# EAGLE board SAMD21_Pro_RF_1W_reroute (EAGLE 9.0.1)
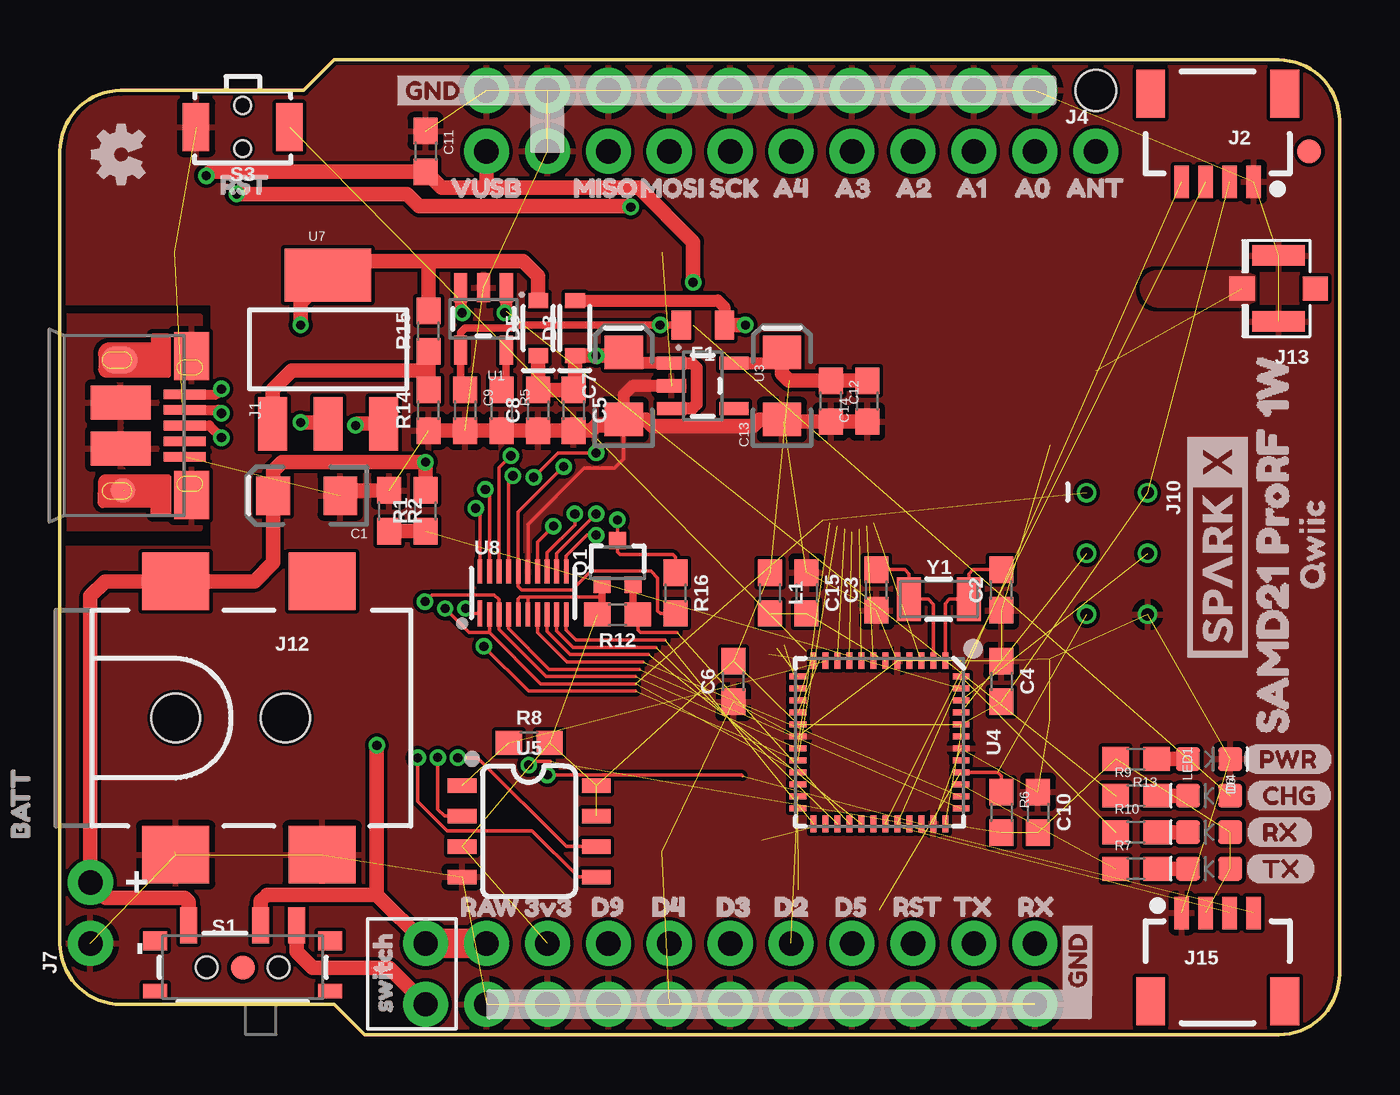
[diagram p0: board, top side]
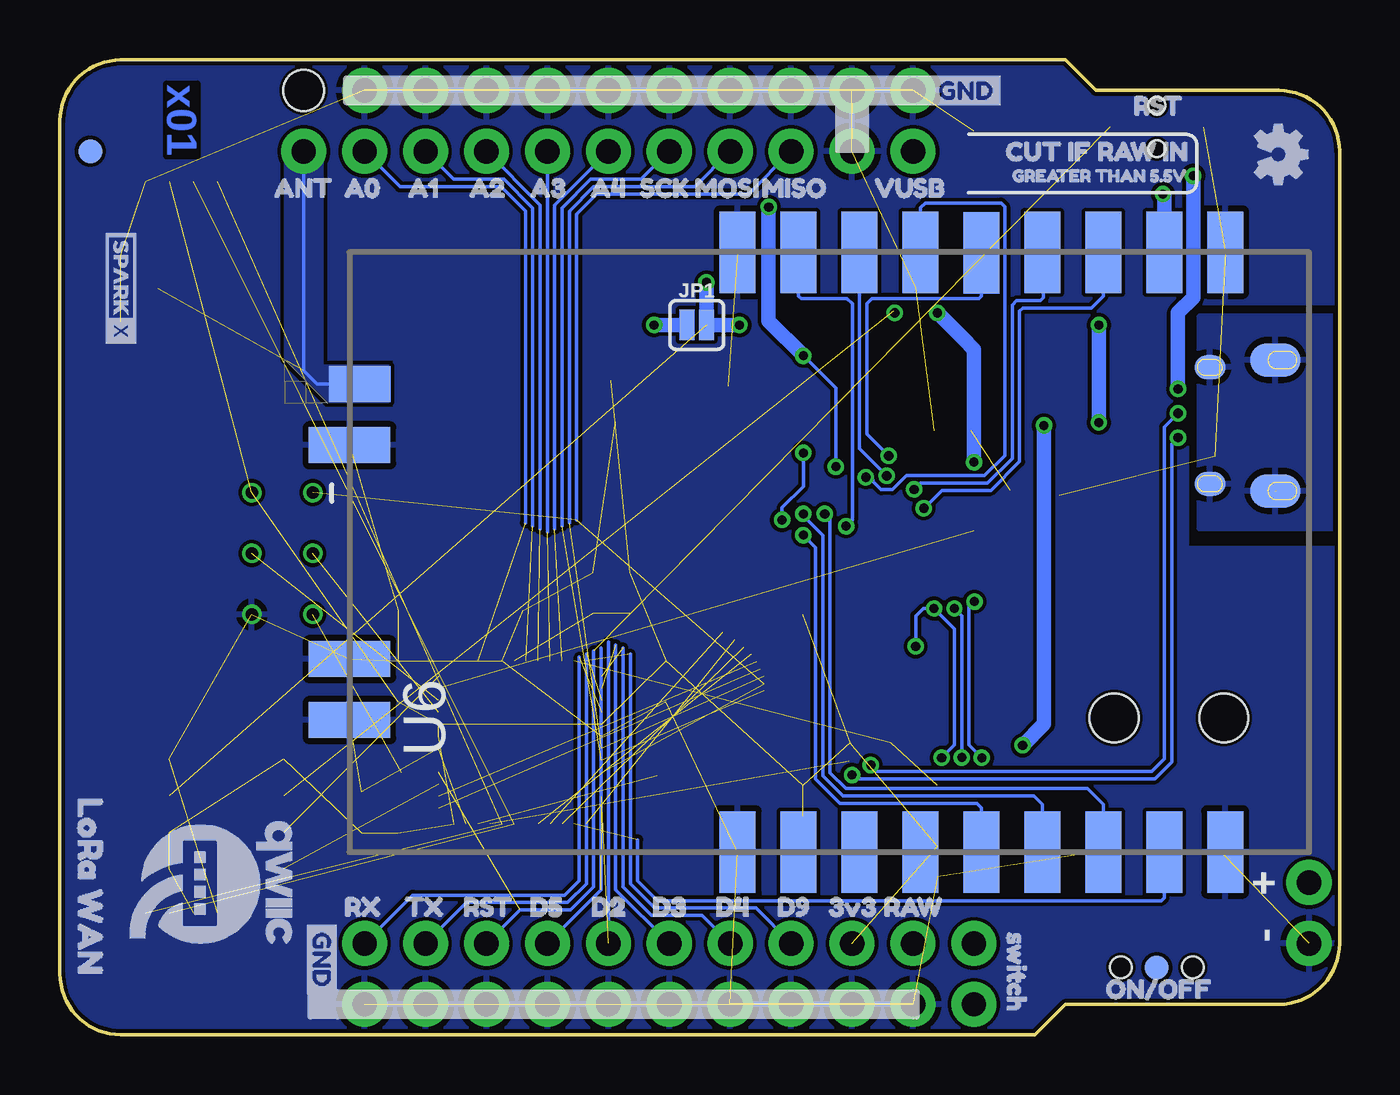
[diagram p1: board, bottom side, seen from below]

Size 53.34 x 40.64 mm. Coordinates in mm from the lower left corner, seen from the top.
Outline: 11.43,1.27 12.7,0 50.8,0 arc90 53.34,2.54 53.34,38.1 arc90 50.8,40.64 11.43,40.64 10.16,39.37 2.54,39.37 arc90 0,36.83 0,3.81 arc90 2.54,1.27 11.43,1.27
Copper layers (1*16): Top 0.035mm / dielectric 1.5mm / Bottom 0.035mm
Design rules "SparkFun-2-layer-PCBWay-LIMIT": minimum track width 6mil, minimum drill 0.3mm, track to track 6mil, track to pad 6mil, pad to pad 6mil, via to via 6mil, smd to smd 6mil, copper to edge 6mil, drill to drill 6mil, minimum pad ring 6mil, minimum via ring 6mil, stop-mask expansion 4mil, vias tented up to drill 25mil, thermal gap 10mil
Net classes: 0 default: width 0 mm, drill 0 mm; 1 vcc: width 0 mm
Holes 1.7 mm at 43.18,39.37

## Footprints (pad centres in the part's own frame; a part is rotated, then mirrored left to right if it is on the bottom)
EIA3216 = smd 1.4 x 1.6: + 1.4,0; - -1.4,0
0603 = smd 1.1 x 1: 1 -0.85,0; 2 0.85,0
LED-0603 = smd 1 x 1: A -0.877,0; C 0.877,0
SOD-323 = smd 0.63 x 0.83: A 1.15,0; C -1.15,0
0805 = smd 0.8 x 1.2: 1 -0.9,0; 2 0.9,0
FIDUCIAL-1X2 = smd 1 x 1: 1 0,0
USB-MICROB-PTH-MILL = smd 0.4 x 1.75: D+ 0,0; D- -0.65,0; GND 1.3,0; ID 0.65,0; VBUS -1.3,0 | smd 2 x 1.46: SHIELD -2.9,0.275; SHIELD2 2.9,0.275 | smd 1.425 x 2.5: SHIELD3 -0.963,-2.675; SHIELD4 0.963,-2.675 | smd 1.4 x 2.1 bottom: SHIELD5 -2.731,-2.531; SHIELD7 2.729,-2.531 | smd 1 x 1: SHIELD6 2.7,-2.575 | smd 1.1 x 1.5: SHIELD8 -2.731,-2.731 | smd 1 x 1.3 bottom: SHIELD9 -2.43,0.195; SHIELD10 2.43,0.195
1X04_1MM_RA = smd 0.6 x 1.35: 1 -1.5,0; 2 -0.5,0; 3 0.5,0; 4 1.5,0 | smd 1.2 x 2: NC1 2.8,-3.675; NC2 -2.8,-3.675
1X10_NO_SILK = drill 1.016 pad 1.88: 1 0,0; 2 2.54,0; 3 5.08,0; 4 7.62,0; 5 10.16,0; 6 12.7,0; 7 15.24,0; 8 17.78,0; 9 20.32,0; 10 22.86,0
1X01_NO_SILK = drill 1.016 pad 1.88: 1 0,0
1X09_NO_SILK = drill 1.016 pad 1.88: 1 0,0; 2 2.54,0; 3 5.08,0; 4 7.62,0; 5 10.16,0; 6 12.7,0; 7 15.24,0; 8 17.78,0; 9 20.32,0
1X02_NO_SILK = drill 1.016 pad 1.88: 1 0,0; 2 2.54,0
2X3_TEST_POINTS = drill 0.508: 1 -2.54,-1.27; 2 -2.54,1.27; 3 0,-1.27; 4 0,1.27; 5 2.54,-1.27; 6 2.54,1.27
POWER_JACK_SMD = smd 2.8 x 2.4: GND 0,-5.7; P$4 6.1,-5.7; VIN0 0,5.7; VIN1 6.1,5.7 | hole 2.032: 0,0; 4.572,0
U.FL = smd 2.2 x 0.85: 1 0,1.375; 2 0,-1.375 | smd 1.05 x 1: FEED 1.525,0; NC -1.525,0
SMT-JUMPER_2_NO_SILK = smd 0.635 x 1.27: 1 -0.406,0; 2 0.406,0
SOT323 = smd 0.7 x 0.7: 1 -0.65,-0.925; 2 0.65,-0.925; 3 0,0.925
SWITCH_SPST_SMD_A = smd 0.7 x 1.5: 1 -2.25,-1.75; 2 -0.75,-1.75; 3 2.25,-1.75 | smd 1 x 0.6: GND1 -3.65,1; GND3 3.65,1 | smd 1 x 0.8: GND2 -3.65,-1.1; GND4 3.65,-1.1 | hole 0.9: -1.5,0; 1.5,0
TACTILE_SWITCH_SMD_RIGHT_ANGLE = smd 1.1 x 2: 1 -1.95,0; 2 1.95,0 | hole 0.7: 0,0.9; 0,-0.9
SOT23-5 = smd 0.55 x 1.2: 1 -0.95,-1.3; 2 0,-1.3; 3 0.95,-1.3; 4 0.95,1.3; 5 -0.95,1.3
QFN-48_NO_EXPOSED_PAD = smd 0.7 x 0.25: 1 -3.4,2.75; 2 -3.4,2.25; 3 -3.4,1.75; 4 -3.4,1.25; 5 -3.4,0.75; 6 -3.4,0.25; 7 -3.4,-0.25; 8 -3.4,-0.75; 9 -3.4,-1.25; 10 -3.4,-1.75; 11 -3.4,-2.25; 12 -3.4,-2.75; 25 3.4,-2.75; 26 3.4,-2.25; 27 3.4,-1.75; 28 3.4,-1.25; 29 3.4,-0.75; 30 3.4,-0.25; 31 3.4,0.25; 32 3.4,0.75; 33 3.4,1.25; 34 3.4,1.75; 35 3.4,2.25; 36 3.4,2.75 | smd 0.25 x 0.7: 13 -2.75,-3.4; 14 -2.25,-3.4; 15 -1.75,-3.4; 16 -1.25,-3.4; 17 -0.75,-3.4; 18 -0.25,-3.4; 19 0.25,-3.4; 20 0.75,-3.4; 21 1.25,-3.4; 22 1.75,-3.4; 23 2.25,-3.4; 24 2.75,-3.4; 37 2.75,3.4; 38 2.25,3.4; 39 1.75,3.4; 40 1.25,3.4; 41 0.75,3.4; 42 0.25,3.4; 43 -0.25,3.4; 44 -0.75,3.4; 45 -1.25,3.4; 46 -1.75,3.4; 47 -2.25,3.4; 48 -2.75,3.4
SO08 = smd 0.6 x 1.2: 1 -1.905,-2.8; 2 -0.635,-2.8; 3 0.635,-2.8; 4 1.905,-2.8; 5 1.905,2.8; 6 0.635,2.8; 7 -0.635,2.8; 8 -1.905,2.8
E19-915MS1W = smd 3.4 x 1.5: P$1 0,23.82; P$2 0,21.28; P$3 0,18.74; P$4 0,16.2; P$5 0,13.66; P$6 0,11.12; P$7 0,8.58; P$8 0,6.04; P$9 0,3.5; P$10 25,3.5; P$11 25,6.04; P$12 25,8.58; P$13 25,11.12; P$14 24.98,13.66; P$15 25,16.2; P$16 25,18.74; P$17 25,21.28; P$18 25,23.82 | smd 1.5 x 2.55: P$19 19.5,39.568 | smd 1.5 x 3.4: P$20 16.96,40; P$21 8.04,40; P$22 5.5,40
SOT223 = smd 1.219 x 2.235: 1 -2.311,-3.099; 2 0,-3.099; 3 2.311,-3.099 | smd 3.6 x 2.2: 4 0,3.099
UFDFN-20 = smd 0.2 x 1.1: 1 -1.8,-0.85 | smd 0.2 x 1: 2 -1.4,-0.9; 3 -1,-0.9; 4 -0.6,-0.9; 5 -0.2,-0.9; 6 0.2,-0.9; 7 0.6,-0.9; 8 1,-0.9; 9 1.4,-0.9; 10 1.8,-0.9; 11 1.8,0.9; 12 1.4,0.9; 13 1,0.9; 14 0.6,0.9; 15 0.2,0.9; 16 -0.2,0.9; 17 -0.6,0.9; 18 -1,0.9; 19 -1.4,0.9; 20 -1.8,0.9
CRYSTAL-SMD-3.2X1.5MM = smd 1 x 1.8: P$1 -1.25,0; P$2 1.25,0

## Placement (x,y rotation side)
C1  10uF  [EIA3216]  10.29,22.48 180 top
C2  15pF  [0603]  39.24,18.54 90 top
C3  15pF  [0603]  34.04,18.54 90 top
C4  0.1uF  [0603]  39.24,14.73 270 top
C5  1.0uF  [0603]  21.41,26.04 270 top
C6  0.1uF  [0603]  28.07,14.73 90 top
C7  10uF  [EIA3216]  23.5,27.05 90 top
C8  0.1uF  [0603]  19.94,26.04 90 top
C9  4.7uF  [0603]  16.89,26.04 270 top
C10  0.1uF  [0603]  40.77,9.27 270 top
C11  0.1uF  [0603]  15.24,36.83 270 top
C12  1.0uF  [0603]  32.13,26.42 270 top
C13  10uF  [EIA3216]  30.1,27.05 90 top
C14  0.1uF  [0603]  33.66,26.42 90 top
C15  0.1uF  [0603]  31.11,18.41 270 top
D1  Green  [LED-0603]  47.9,6.92 180 top
D3  3A/10V/300mV  [SOD-323]  21.46,29.46 90 top
D4  BLUE  [LED-0603]  47.9,9.97 180 top
D5  3A/10V/300mV  [SOD-323]  19.94,29.46 90 top
D6  Yellow  [LED-0603]  47.9,8.45 180 top
F1  6V 0.5A  [0805]  26.8,29.59 180 top
FD1  FIDUCIAL1X2  [FIDUCIAL-1X2]  7.62,2.79 0 bottom
FD2  FIDUCIAL1X2  [FIDUCIAL-1X2]  52.07,36.83 0 bottom
FD3  FIDUCIAL1X2  [FIDUCIAL-1X2]  7.62,2.79 0 top
FD4  FIDUCIAL1X2  [FIDUCIAL-1X2]  52.07,36.83 0 top
FRAME2  FRAME-LEDGER  [CREATIVE_COMMONS]  -13.97,-12.7 0 top  (outside the outline)
J1  [USB-MICROB-PTH-MILL]  5.21,25.4 270 top
J2  [1X04_1MM_RA]  48.26,35.56 180 top
J3  [1X10_NO_SILK]  17.78,3.81 0 top
J4  [1X01_NO_SILK]  43.18,36.83 0 top
J5  [1X09_NO_SILK]  20.32,39.37 0 top
J6  [1X10_NO_SILK]  17.78,1.27 0 top
J7  PTH  [1X02_NO_SILK]  1.27,3.81 90 top
J8  [1X02_NO_SILK]  17.78,39.37 270 top
J9  External On/Off  [1X02_NO_SILK]  15.24,3.81 270 top
J10  AVR_SPI_PROG_3X2TESTPOINTS  [2X3_TEST_POINTS]  44.07,20.07 270 top
J11  [1X09_NO_SILK]  20.32,36.83 0 top
J12  5.5x2.1mm Barrel  [POWER_JACK_SMD]  4.83,13.21 0 top
J13  U.FL  [U.FL]  50.8,31.11 180 top
J15  [1X04_1MM_RA]  48.26,5.08 0 top
JP1  FuseBypass  [SMT-JUMPER_2_NO_SILK]  26.8,29.59 0 bottom
L1  [0603]  29.59,18.41 270 top
LED1  RED  [LED-0603]  47.9,11.49 0 top
LOGO1  OSHW-LOGOMINI  [OSHW-LOGO-MINI]  2.54,36.7 270 bottom
Q1  310mA/60V/1.6Ω  [SOT323]  23.24,19.68 0 top
R1  10k  [0603]  15.24,21.84 90 top
R2  10k  [0603]  13.72,21.84 270 top
R5  2.0k  [0603]  18.41,26.04 270 top
R6  10k  [0603]  39.24,9.27 270 top
R7  1k  [0603]  44.86,6.92 0 top
R8  10k  [0603]  19.56,12.17 0 top
R9  1k  [0603]  44.86,9.97 0 top
R10  1k  [0603]  44.86,8.45 0 top
R12  10k  [0603]  23.24,17.53 180 top
R13  1k  [0603]  44.86,11.49 180 top
R14  750K  [0603]  15.37,26.04 90 top
R15  240  [0603]  15.37,29.34 90 top
R16  10k  [0603]  25.65,18.41 270 top
S1  Power  [SWITCH_SPST_SMD_A]  7.62,2.82 180 top
S3  [TACTILE_SWITCH_SMD_RIGHT_ANGLE]  7.62,37.85 180 top
U1  MCP73831  [SOT23-5]  17.65,29.84 180 top
U3  3.3V  [SOT23-5]  26.8,27.05 270 top
U4  ATSAMD21G  [QFN-48_NO_EXPOSED_PAD]  34.16,12.19 270 top
U5  4MB Flash  [SO08]  19.56,8.48 270 top
U6  E19-915MS1W  [E19-915MS1W]  1.27,7.62 90 bottom
U7  ADJ5  [SOT223]  11.18,28.57 0 top
U8  TXB0108DQSR  [UFDFN-20]  19.3,18.41 0 top
U$1  [VUSB7]  15.62,35.31 0 top
U$2  [D20]  31.88,5.33 0 bottom
U$3  [A43]  29.08,35.31 0 top
U$4  [A34]  31.62,35.31 0 top
U$5  [A25]  34.16,35.31 0 top
U$6  [A16]  36.7,35.31 0 top
U$7  [A07]  39.12,35.31 0 top
U$8  [MISO8]  20.7,35.31 0 top
U$9  [MOSI9]  23.5,35.31 0 top
U$10  [SCK10]  26.42,35.31 0 top
U$11  [ANT11]  41.27,35.31 0 top
U$12  [GND0]  13.72,39.37 0 top
U$13  [RST2]  34.04,5.33 0 top
U$14  [VUSB7]  20.07,35.31 0 bottom
U$15  [D90]  21.46,5.33 0 top
U$16  [D90]  24.13,5.33 0 bottom
U$17  [GND0]  42.42,4.95 270 bottom
U$18  [D20]  29.08,5.33 0 top
U$19  [RX2]  42.16,5.33 0 bottom
U$20  [D30]  26.67,5.33 0 top
U$21  [D30]  29.34,5.33 0 bottom
U$22  [D40]  24,5.33 0 top
U$23  [3V320]  18.67,5.33 0 top
U$24  [RAW21]  16,5.33 0 top
U$25  [LORA0]  52.07,10.79 270 bottom
U$26  SPECIAL_INSTRUCTIONS-ORDERING  [ORDERING_INSTRUCTIONS]  -34.29,-13.97 0 top  (outside the outline)
U$27  [SWITCH6]  13.46,0.25 90 top
U$28  [RST2]  5.97,35.43 0 top
U$29  [BATT25]  -1.65,7.49 90 top
U$30  [QWIIC-LOGO-MEDIUM]  46.99,6.35 270 bottom
U$31  [D40]  26.67,5.33 0 bottom
U$32  [BATT25]  -4.95,12.32 90 top  (outside the outline)
U$33  [D50]  34.42,5.33 0 bottom
U$34  SPARKX-LOGO2  [SPARKX-TINY]  50.8,31.11 270 bottom
U$35  [WAN1]  52.07,6.99 270 bottom
U$36  [RST2]  9.27,38.73 0 bottom
U$37  [SWITCH6]  13.46,4.95 270 bottom
U$38  [GND0]  17.4,39.37 0 bottom
U$39  [ON#OFF0]  10.41,1.91 0 bottom
U$41  [RST2]  37.21,5.33 0 bottom
U$42  [A43]  31.88,35.31 0 bottom
U$43  [A34]  34.42,35.31 0 bottom
U$44  [A25]  36.96,35.31 0 bottom
U$45  [A16]  39.5,35.31 0 bottom
U$46  [A07]  42.16,35.31 0 bottom
U$47  [MISO8]  24.77,35.31 0 bottom
U$48  [MOSI9]  27.56,35.31 0 bottom
U$49  [SCK10]  29.84,35.31 0 bottom
U$50  [ANT11]  45.09,35.31 0 bottom
U$51  [SPARKX-MEDIUM]  48.26,20.32 90 top
U$52  [RAW21]  19.68,5.33 0 bottom
U$53  [3V320]  21.97,5.33 0 bottom
U$55  [D514]  31.62,5.33 0 top
U$57  [TX3]  39.62,5.33 0 bottom
U$58  [CUT_IF_RAW_IN0]  14.61,36.83 0 bottom
U$59  [GREATER_THAN_5#5V0]  14.1,35.81 0 bottom
U$60  [QWIIC-TEXT-04]  52.2,17.65 90 top
U$61  [OSHW-LOGO-MINI]  2.54,36.7 90 top
U$62  [GND0]  42.42,1.27 90 top
U$63  [PWR-()-03]  49.3,11.49 0 top
U$65  [CHG1]  49.43,9.97 0 top
U$69  [TX3]  36.58,5.33 0 top
U$70  [TX6]  49.43,6.92 0 top
U$72  [RX7]  49.43,8.45 0 top
U$73  [RX2]  39.24,5.33 0 top
U$81  [SAMD21_PRORF_1W5]  50.55,11.43 90 top
Y1  32.768kHz  [CRYSTAL-SMD-3.2X1.5MM]  36.64,18.16 0 top

## Library data of the parts
C1 C7 C13 = SparkFun-Capacitors; PROD_ID: CAP-00811
C2 C3 = SparkFun-Capacitors; PROD_ID: CAP-07881
C4 C6 C8 C10 C11 C14 C15 = SparkFun-Capacitors; PROD_ID: CAP-00810
C5 C12 = SparkFun-Capacitors; PROD_ID: CAP-00868
C9 = SparkFun-Capacitors; PROD_ID: CAP-08280
D1 = SparkFun-LED; PROD_ID: DIO-00821
D3 D5 U6 = SAMD21_ProRF_1W
D4 = SparkFun-LED; PROD_ID: DIO-08575
D6 = SparkFun-LED; PROD_ID: DIO-09003
F1 = SparkFun-Fuses
FD1-FD4 FRAME2 LOGO1 U$26 U$61 = SparkFun-Aesthetics
J1 = SparkFun-Connectors; PROD_ID: CONN-13711
J2 J15 = SparkFun-Connectors; PROD_ID: CONN-13694
J3 J6 = SparkFun-Connectors; PROD_ID: CONN-11563
J4 J5 J7-J11 = SparkFun-Connectors
J12 = SparkFun-Connectors; PROD_ID: CONN-08106; SF_ID: PRT-12748
J13 = SparkFun-Connectors; PROD_ID: CONN-09193; SF_ID: WRL-09144
JP1 = SparkFun-Jumpers
L1 = SparkFun-Coils; PROD_ID: NDUC-07859
LED1 = SparkFun-LED; PROD_ID: DIO-00819
Q1 = SparkFun-DiscreteSemi; PROD_ID: TRANS-11151
R1 R2 R6 R8 R12 R16 = SparkFun-Resistors; PROD_ID: RES-00824
R5 = SparkFun-Resistors; PROD_ID: RES-08296
R7 R9 R10 R13 = SparkFun-Resistors; PROD_ID: RES-07856
R14 = SparkFun-Resistors; PROD_ID: RES-13768
R15 = SparkFun-Resistors; PROD_ID: RES-07849
S1 = SparkFun-Switches; PROD_ID: SWCH-10651; SF_SKU: COM-10860
S3 = SparkFun-Switches; PROD_ID: COMP-12265
U1 = SparkFun-IC-Power; PROD_ID: IC-09995
U3 = SparkFun-IC-Power; PROD_ID: VREG-12457
U4 = temp
U5 = SparkFun-IC-Memory; PROD_ID: IC-12455
U7 = SparkFun-IC-Power; PROD_ID: VREG-08170
U8 = SparkFun-IC-Comms; PROD_ID: IC-12292
U$1 U$14 U$27 U$37 U$81 = buzzard_labels
U$2 U$18 = D2
U$3-U$13 U$17 U$23 U$24 U$28 U$29 U$32 U$36 U$38 U$41-U$50 U$52 U$53 U$55 U$62 = buzzard_labels (25)
U$15 U$16 = buzzard_labels (10)
U$19 U$57 U$69 U$70 U$72 U$73 = buzzard_labels (8)
U$20 U$21 = D3
U$22 U$31 = D4
U$25 U$35 = buzzard_labels (3)
U$30 U$60 U$63 = Labels
U$33 = D5
U$34 U$51 = SparkX
U$39 = buzzard_labels (28)
U$58 = CUTIFRAW
U$59 = GREATER
U$65 = buzzard_labels (9)
Y1 = SparkFun-Clocks; PROD_ID: XTAL-13062

## Nets
3.3V [vcc]: C4.2 C6.2 C10.2 C12.1 C13.+ C14.2 D1.A D6.A J2.2 J3.2 J10.2 J15.2 L1.1 Q1.1 R6.2 R8.2 R12.2 R13.2 U3.5 U4.17 U4.36 U4.43 U4.44 U5.3 U5.7 U5.8 U8.5 U8.6
5V [vcc]: C5.1 C7.+ C8.2 D3.C D5.C R16.2 U3.1 U3.3 U6.P$11 U8.16
!RFM_CS: Q1.2 R12.1 U4.28
!RFM_CS5V: Q1.3 R16.1 U6.P$15
!RST: J3.8 J10.5 R6.1 S3.1 U4.40
A0: J11.9 U4.3
A1: J11.8 U4.7
A2: J11.7 U4.8
A3: J11.6 U4.9
A4: J11.5 U4.10
ANT: J4.1 J13.FEED U6.P$19
CHARGE_STAT: R9.1 U1.1
D2: J3.6 U4.23
D3: J3.5 U4.14
D4: J3.4 U4.13
D5: J3.7 U4.24
D8_!FLASH_CS: R8.1 U4.11 U5.1
D9: J3.3 U4.12
D10: U4.27 U8.9
D11: U4.25 U8.10
D+: J1.D+ U4.34
D-: J1.D- U4.33
DIO05V: U6.P$7 U8.13
DIO15V: U6.P$6 U8.12
DIO25V: U6.P$5 U8.11
GND: C1.- C2.1 C3.1 C4.1 C5.2 C6.1 C7.- C8.1 C9.2 C10.1 C11.1 C12.2 C13.- C14.1 C15.1 J1.GND J2.1 J5.1 J5.2 J5.3 J5.4 J5.5 J5.6 J5.7 J5.8 J5.9 J6.1 J6.2 J6.3 J6.4 J6.5 J6.6 J6.7 J6.8 J6.9 J6.10 J7.1 J8.1 J10.6 J11.1 J12.GND J12.P$4 J13.1 J13.2 J15.1 LED1.C R2.1 R5.2 R14.1 S3.2 U1.2 U3.2 U4.5 U4.18 U4.35 U4.42 U5.4 U6.P$1 U6.P$9 U6.P$10 U6.P$18 U6.P$20 U6.P$21 U6.P$22 U8.15
MISO: J10.1 J11.2 U4.21 U5.2 U8.2
MISO5V: U6.P$13 U8.19
MOSI: J11.3 U4.19 U5.5 U8.3
MOSI5V: U6.P$14 U8.18
N$1: D6.C R10.2
N$2: D1.C R7.2
N$6: C2.2 U4.1 Y1.P$2
N$7: C3.2 U4.2 Y1.P$1
N$8: D4.C R9.2
N$9: J9.2 S1.1
N$11: R5.1 U1.5
N$12 [vcc]: D3.A F1.1 JP1.1
N$13: R14.2 R15.1 U7.1
N$14 [vcc]: D5.A R15.2 U7.2 U7.4
N$38: LED1.A R13.1
RAW [vcc]: J3.1 J9.1 S1.2 U7.3
RFM_INT: U4.29 U8.8
RFM_RST: U4.26 U6.P$8
RFM_RXEN: U4.38 U8.7
RFM_RXEN5V: U6.P$17 U8.14
RFM_TXEN: U4.37 U8.4
RFM_TXEN5V: U6.P$16 U8.17
RX_LED: R10.1 U4.48
RXI: J3.10 U4.16
SCK: J11.4 U4.20 U5.6 U8.1
SCK5V: U6.P$12 U8.20
SCL: J2.4 J15.4 U4.32
SDA: J2.3 J15.3 U4.31
SHLD: J1.SHIELD J1.SHIELD2 J1.SHIELD3 J1.SHIELD4 J1.SHIELD5 J1.SHIELD6 J1.SHIELD7 J1.SHIELD8 J1.SHIELD9 J1.SHIELD10
SWDCLK: J10.3 U4.45
SWDIO: J10.4 U4.46
TX_LED: R7.1 U4.39
TXO: J3.9 U4.15
USB_VCC [vcc]: C9.1 C11.2 D4.A F1.2 J1.VBUS J8.2 JP1.2 U1.4
VBATT: C1.+ J7.2 J12.VIN0 R1.2 S1.3 U1.3
VBATT_LVL: R1.1 R2.2 U4.47
VDDANA [vcc]: C15.2 L1.2 U4.6

## Tracks (layer width: path | path; a pad name or v marks a point on that pad's centre or on a via)
3.3V  (21 unrouted)
  Top 0.152: U8.5 19.1,18.16 19.19,18.24 19.48,18.24 | 22.59,18.16 22.51,18.24 19.48,18.24 | U8.6 19.5,18.22 19.48,18.24
  Top 0.305: Q1.1 22.59,18.16 22.59,17.73 R12.2
  Top 0.508: U3.5 29.65,28 C13.+
  Top 0.61: C14.2 C12.1 30.39,27.27 30.1,27.56 C13.+
5V  (via drill 0.38)
  Top 0.152: v21,23.69 19.1,21.79 U8.16 19.1,18.69 19.25,18.55 21.34,18.55 22.13,19.34 24.63,19.34 24.92,19.05 24.92,17.68 25.03,17.57 R16.2
  Top 0.508: C7.+ 23.95,28 U3.1 26.36,28 26.54,27.81 26.54,26.29 26.36,26.1 U3.3
  Top 0.61: D5.C C8.2 C5.1 21.46,26.94 D3.C v22.35,28.31 23.36,28.31 C7.+ | v7.37,35.05 14.47,35.05 14.98,34.54 23.76,34.54 v23.8,34.51
  Bottom 0.152: v21,23.69 21,26.96 v22.35,28.31
  Bottom 0.61: U6.P$11 7.31,35 v7.37,35.05 | v23.8,34.51 23.8,29.76 v22.35,28.31
!RFM_CS  (1 unrouted)
  Top 0.152: R12.1 24.09,16.88 24.21,16.76 25.73,16.76
  Top 0.305: Q1.2 23.89,17.73 R12.1
!RFM_CS5V  (via drill 0.38)
  Top 0.152: v19.74,23.24 20.76,24.26 v22.35,24.26 | v23.24,21.46 Q1.3 23.24,20.12 23.34,20.02 25.55,20.02 25.65,19.91 R16.1
  Bottom 0.152: U6.P$15 17.47,34.47 17.27,34.67 14.1,34.67 13.95,34.52 13.95,24.15 14.8,23.3 18.06,23.3 18.64,22.73 19.11,22.73 19.45,23.07 19.45,23.13 19.56,23.24 v19.74,23.24 | v23.24,21.46 23.24,21.97 22.35,22.86 v22.35,24.26
!RST  (3 unrouted)
  Top 0.152: U4.40 39.1,10.94 39.24,10.79 R6.1
  Bottom 0.152: J3.8 34.16,5.21 32.05,5.21 31.09,6.17 31.09,16
A0  (1 unrouted)
  Bottom 0.152: J11.9 39.17,35.36 34.95,35.36 33.93,34.34 33.93,21.34
A1  (1 unrouted)
  Bottom 0.152: J11.8 36.93,35.66 34.82,35.66 33.63,34.47 33.63,21.21
A2  (1 unrouted)
  Bottom 0.152: J11.7 33.33,34.59 33.33,21.08
A3  (1 unrouted)
  Bottom 0.152: J11.6 33.02,20.95
A4  (1 unrouted)
  Bottom 0.152: J11.5 32.72,34.59 32.72,21.08
ANT  (1 unrouted)
  Bottom 0.152: U6.P$19 42.61,27.12 43.18,27.69 J4.1
  pour Top (no thermals): 49.78,31.62 49.28,31.83 45.8,31.83 arc90 45.09,31.11 arc90 45.82,30.38 49.28,30.38 49.78,30.61
  pour Bottom (no thermals): 42.38,36.83 42.38,27.94 39.65,27.94 39.65,26.34 42.1,26.34 43.98,28.21 43.98,36.83 arc90 43.18,37.63 arc90
CHARGE_STAT  (via drill 0.38)  (1 unrouted)
  Top 0.508: U1.1 18.6,30.16 v18.54,30.1
D2  (1 unrouted)
  Bottom 0.152: J3.6 30.48,16.38
D3  (1 unrouted)
  Bottom 0.152: J3.5 30.18,6.04 30.18,16.26
D4  (1 unrouted)
  Bottom 0.152: J3.4 26.57,4.98 28.68,4.98 29.87,6.17 29.87,16.13
D5  (1 unrouted)
  Bottom 0.152: J3.7 30.79,6.04 30.79,16.13
D8_!FLASH_CS  (2 unrouted)
D9  (1 unrouted)
  Bottom 0.152: J3.3 24.33,5.28 28.55,5.28 29.57,6.3 29.57,15.88
D10  (1 unrouted)
  Top 0.152: U8.9 20.7,16.84 21.39,16.15 24.84,16.15
D11  (1 unrouted)
  Top 0.152: U8.10 21.1,16.87 21.51,16.46 25.22,16.46
D+  (via drill 0.38)  (1 unrouted)
  Top 0.152: v20.32,10.83 28.41,10.83 28.45,10.79
  Top 0.406: J1.D+ 6.22,25.4 v6.73,24.89
  Bottom 0.152: v20.32,10.83 20.16,10.67 7.7,10.67 7,11.37 7,24.62 v6.73,24.89
D-  (via drill 0.38)  (1 unrouted)
  Top 0.152: v19.54,11.24 19.71,11.4 20.45,11.4
  Top 0.406: J1.D- 6.59,26.05 v6.73,25.91
  Bottom 0.152: v6.73,25.91 7.3,25.34 7.3,11.49 7.82,10.97 14.1,10.97 19.27,10.97 v19.54,11.24
DIO05V  (via drill 0.38)
  Top 0.152: v21.46,21.72 21.46,21.26 20.3,20.1 U8.13
  Bottom 0.152: U6.P$7 9.85,9.6 10.52,10.26 20.57,10.26 21.23,10.92 21.23,21.49 v21.46,21.72
DIO15V  (via drill 0.38)
  Top 0.152: v22.35,21.72 20.7,20.07 U8.12
  Bottom 0.152: U6.P$6 12.39,9.6 12.75,9.96 20.7,9.96 21.54,10.79 21.54,20.82 22.35,21.64 v22.35,21.72
DIO25V  (via drill 0.38)
  Top 0.152: U8.11 21.1,19.96 21.97,20.83 v22.35,20.83
  Bottom 0.152: U6.P$5 14.93,9.47 15.11,9.65 20.83,9.65 21.65,10.48 21.84,10.67 21.84,20.32 v22.35,20.83
GND  (53 unrouted)
  Top 0.152: U8.15 19.5,21.28 21.84,23.62 23.11,23.62 23.5,24 C7.-
  Top 0.508: U3.2 23.88,27.05 23.5,26.67 C7.-
  Top 0.61: R14.1 C9.2 R5.2 C8.1 C5.2 22.14,25.18 22.35,25.4 23.24,25.4 C7.- 24.43,25.65 24.71,25.37 28.89,25.37 29.17,25.65 C13.- 30.18,25.57 C12.2 C14.1 | R2.1 11.9,22.69 C1.-
  pour Top (isolate 0.152, rank 2): 53.34,40.64 0,40.64 0,30.48 6.35,30.48 6.35,20.32 0,20.32 0,0 53.34,0
  pour Bottom (isolate 0.152, rank 2): 0,40.64 53.34,40.64 53.34,0 0,0 0,20.32 6.35,20.32 6.35,30.48 0,30.48
MISO  (via drill 0.38)  (3 unrouted)
  Top 0.152: U5.2 16.03,9.12 15.75,9.4 v15.75,11.56 | U8.2 17.9,16.76 | 17.9,16.76 20.04,14.63 24,14.63 | 17.9,16.76 17.06,16.76 v16.05,17.77
  Bottom 0.152: J11.2 24.64,35.05 30.96,35.05 31.8,34.22 31.8,21.46 | v15.75,11.56 15.75,17.46 v16.05,17.77
MISO5V  (via drill 0.38)
  Top 0.152: v17.73,22.73 17.9,22.56 U8.19
  Bottom 0.152: U6.P$13 12.39,30.99 12.34,30.94 12.34,30.73 12.47,30.61 13.46,30.61 13.65,30.42 13.65,24.02 14.67,23 17.47,23 v17.73,22.73
MOSI  (via drill 0.38)  (2 unrouted)
  Top 0.152: 24,14.94 20.27,14.94 18.3,16.9 U8.3 18.3,18.14 18.11,18.34 15.5,18.34 v15.22,18.06 | U5.5 21.61,6.58 19.68,8.51 16.13,8.51 14.91,9.73 v14.91,11.54
  Bottom 0.152: J11.3 26.87,35.36 31.09,35.36 32.11,34.34 32.11,21.34 | v14.91,11.54 15.44,12.08 15.44,17.83 v15.22,18.06
MOSI5V  (via drill 0.38)
  Top 0.152: v18.8,24.14 18.3,23.65 U8.18
  Bottom 0.152: U6.P$14 14.93,30.79 15.03,30.69 19.49,30.69 19.7,30.48 19.7,25.05 v18.8,24.14
N$1
  Top 0.61: R10.2 D6.C
N$2
  Top 0.61: R7.2 D1.C
N$6
  Top 0.152: U4.1 36.91,17.99 37.08,18.16 Y1.P$2 37.89,19.22 38.06,19.39 C2.2
N$7
  Top 0.152: U4.2 36.41,17.94 36.2,18.16 Y1.P$1 35.39,19.22 35.22,19.39 C3.2
N$8
  Top 0.61: R9.2 D4.C
N$9
  Top 0.61: S1.1 9.87,3.46 10.54,2.79 13.72,2.79 J9.2
N$11
  Top 0.305: U1.5 18.6,27.07 R5.1
N$12  (via drill 0.38)
  Top 0.508: D3.A 27.43,30.61 27.7,30.34 F1.1
  Top 0.61: v28.57,29.59 F1.1
  Bottom 0.61: JP1.1 v28.57,29.59
N$13
  Top 0.61: R15.1 15.37,27.69 | 15.37,27.69 R14.2 | U7.1 8.87,26.9 9.65,27.69 15.37,27.69
N$14  (via drill 0.38)
  Top 0.61: D5.A 19.94,31.62 19.3,32.26 15.37,32.26 | 15.37,32.26 11.76,32.26 U7.4 10.03,30.53 v10.03,29.59 | U7.2 11.12,25.53 v10.03,25.53 | R15.2 15.37,32.26
  Bottom 0.61: v10.03,25.53 v10.03,29.59
N$38
  Top 0.61: R13.1 LED1.A
RAW  (via drill 0.38)
  Top 0.61: S1.2 8.37,5.58 8.64,5.84 13.21,5.84 | 13.21,5.84 J9.1 | 13.21,5.84 v13.21,12.06 | v12.32,25.4 12.39,25.48 U7.3
  Top 1.219: J3.1 J9.1
  Bottom 0.61: v12.32,25.4 12.32,12.95 v13.21,12.06
RFM_INT  (1 unrouted)
  Top 0.152: U8.8 20.3,16.81 21.26,15.85 24.54,15.85
RFM_RST  (1 unrouted)
  Bottom 0.152: U6.P$8 7.31,5.71 7.44,5.59 28.43,5.59 29.26,6.42 29.26,8.13
RFM_RXEN  (1 unrouted)
  Top 0.152: U8.7 19.9,16.78 21.14,15.54 24.31,15.54
RFM_RXEN5V  (via drill 0.38)
  Top 0.152: U8.14 19.9,20.54 v20.57,21.21
  Bottom 0.152: U6.P$17 22.55,30.8 22.44,30.69 20.53,30.69 20.32,30.48 20.32,21.47 v20.57,21.21
RFM_TXEN  (1 unrouted)
  Top 0.152: U8.4 18.7,16.93 20.4,15.24 24.16,15.24
RFM_TXEN5V  (via drill 0.38)
  Top 0.152: v18.88,23.3 18.7,23.13 U8.17
  Bottom 0.152: v18.88,23.3 20.01,24.44 U6.P$16
RX_LED  (1 unrouted)
RXI  (1 unrouted)
  Bottom 0.152: J3.10 38.63,5.82 32.31,5.82 31.7,6.42 31.7,15.75
SCK  (via drill 0.38)  (2 unrouted)
  Top 0.152: U5.6 21.11,7.85 17.41,11.54 v16.59,11.54 | U8.1 17.11,17.57 v16.9,17.77 | v17.67,16.19 19.53,14.33 24,14.33
  Bottom 0.152: J11.4 29.11,35.66 31.22,35.66 32.41,34.47 32.41,21.21 | 16.59,17.45 v16.9,17.77 | v16.59,11.54 16.05,12.08 16.05,16.92 v16.9,17.77 | v17.67,16.19 17.67,17.46 17.36,17.77 v16.9,17.77
SCK5V  (via drill 0.38)
  Top 0.152: v17.33,21.95 17.5,21.78 U8.20
  Bottom 0.152: U6.P$12 9.85,30.79 10.34,30.3 13.21,30.3 13.34,30.17 13.34,23.9 14.54,22.7 16.59,22.7 v17.33,21.95
SCL  (2 unrouted)
SDA  (2 unrouted)
SHLD  (1 unrouted)
  pour Bottom (isolate 0.203): 5.84,29.97 0,29.97 0,21.08 5.84,21.08
  pour Top (isolate 0.203): 0,29.97 5.84,29.97 5.84,21.08 0,21.08
SWDCLK  (1 unrouted)
SWDIO  (1 unrouted)
TX_LED  (1 unrouted)
TXO  (1 unrouted)
  Bottom 0.152: J3.9 36.4,5.51 32.18,5.51 31.39,6.3 31.39,15.88
USB_VCC  (via drill 0.38)  (1 unrouted)
  Top 0.305: U1.4 16.7,27.07 C9.1 | U1.4 16.8,28.45 | U1.4 16.7,29.28 16.88,29.45 18.81,29.45 18.95,29.59 v25.02,29.59 F1.2
  Top 0.406: J1.VBUS 6.51,26.7 v6.73,26.92
  Top 0.61: v6.1,35.81 6.26,35.98 C11.2 15.91,35.31 17.78,35.31 | 17.78,35.31 24.13,35.31 26.39,33.05 v26.39,31.37 | J8.2 17.78,35.31
  Bottom 0.61: v25.02,29.59 JP1.2 v26.39,31.37 | v6.73,26.92 6.73,30.1 6.1,30.73 v6.1,35.81
VBATT  (via drill 0.38)
  Top 0.508: U1.3 16.7,30.16 v16.76,30.1
  Top 0.61: S1.3 5.37,5.55 5.21,5.71 1.91,5.71 J7.2 1.27,18.29 1.89,18.91 J12.VIN0 8.11,18.91 8.89,19.68 C1.+ 8.89,23.49 9.27,23.88 v15.24,23.88 15.24,23.37 R1.2
  Bottom 0.61: v15.24,23.88 15.24,28.57 15.68,29.02 v16.76,30.1
VBATT_LVL  (1 unrouted)
  Top 0.61: R2.2 R1.1
VDDANA  (2 unrouted)

## Text on the board
Bottom: x01
tPlace: + | - | + | -
bPlace: + | -
bValues: RFM69 / or / RFM95W
tDocu: Owen Lyke | 0.8mm Board Thickness